# Altium PCB PCB bai 1.PcbDoc
Units mil, origin at the board's own origin, x right, y up, seen from the top; angles counter-clockwise.
Board outline 4135.03 x 2330.02 mil, 2 copper layers (Top Layer, Bottom Layer); 25 components, 18 nets, 88 pads, 0 vias.
Unrouted connection lines stored in the file: 31.
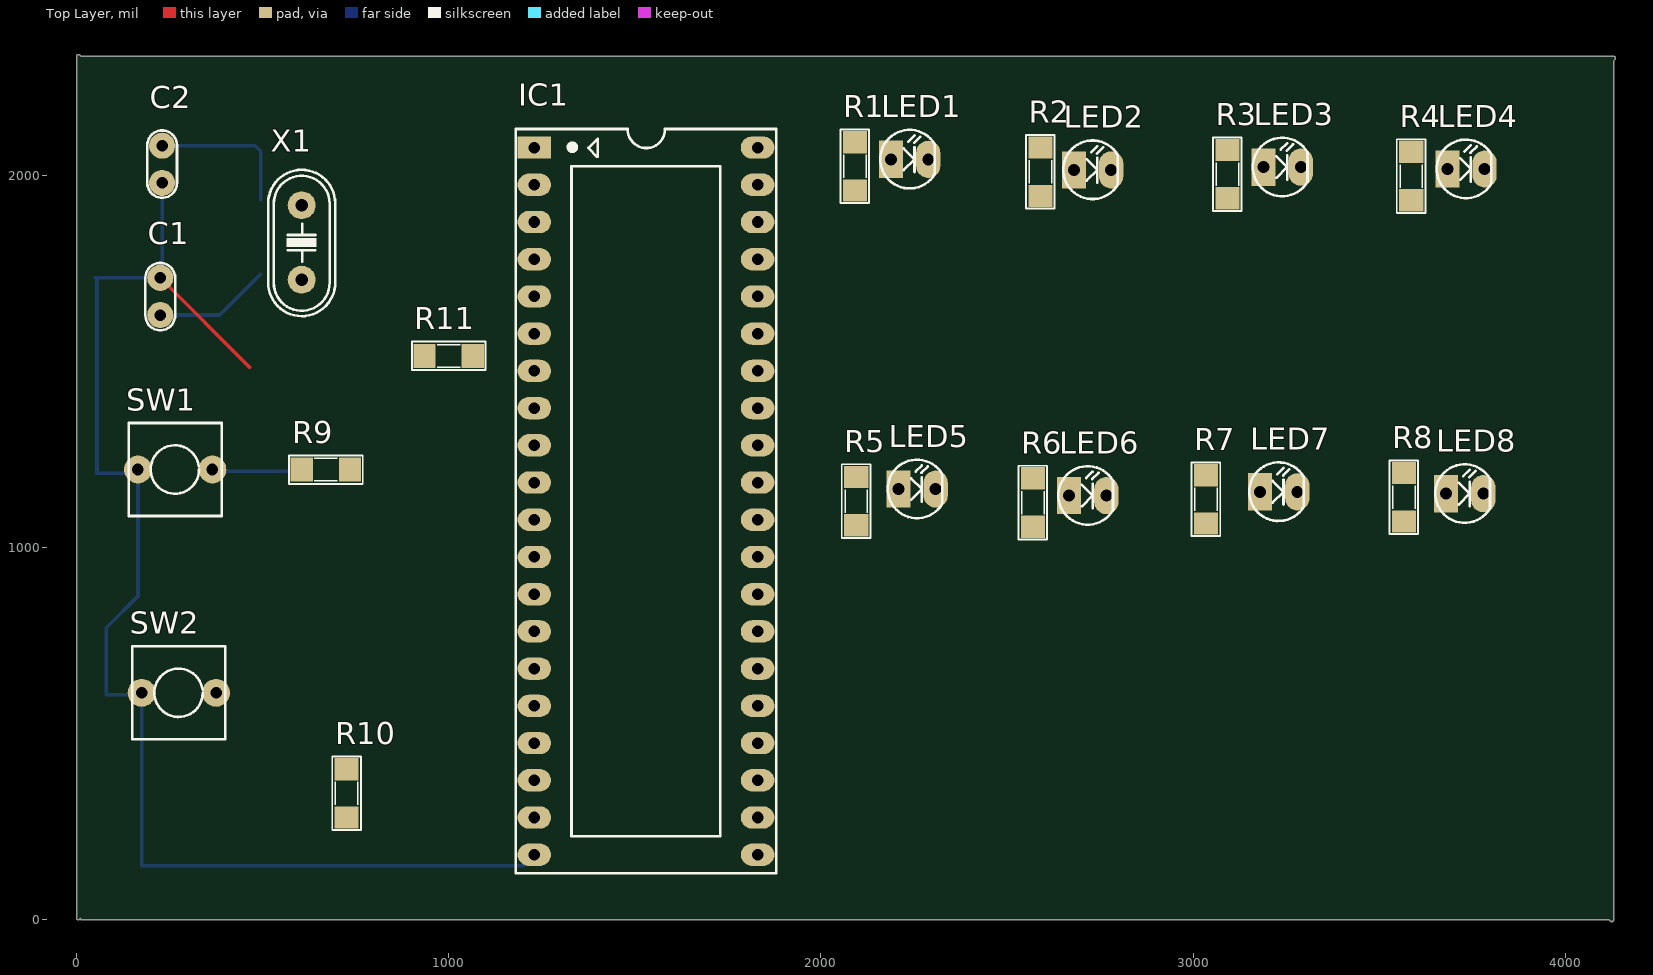
[diagram p0: Top Layer view]
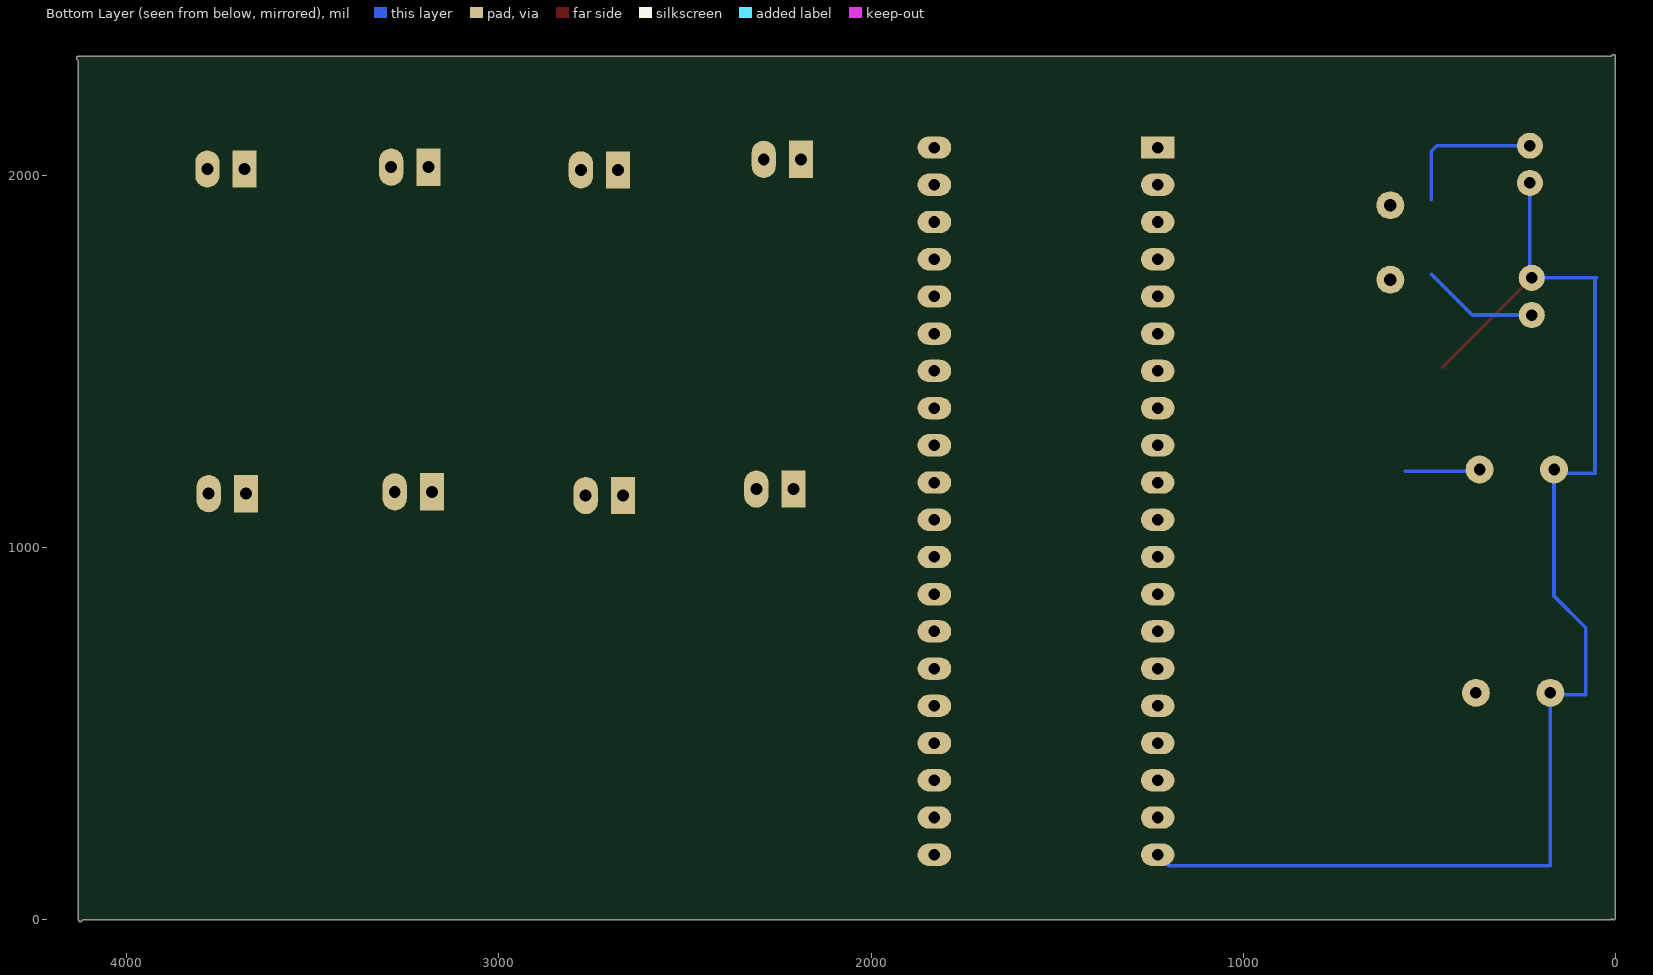
[diagram p1: Bottom Layer view, seen from below]

## Layer stack, top to bottom
Top Solder: solder mask 0.4, Solder Resist, Dk 3.5
Top Layer: signal copper 1.4
Dielectric 1: dielectric 12.6, FR-4, Dk 4.8
Bottom Layer: signal copper 1.4
Bottom Solder: solder mask 0.4, Solder Resist, Dk 3.5

## Board outline
-0.02,5 -0.02,2320 cw(c5,2320) 8.56,2323.53 8.55,2323.55 12.08,2320.02 4130,2320.02 cw(c4130,2315) 4135.02,2315 cw(c4130,2315) 4133.53,2311.44 4133.55,2311.45 4130.02,2307.92 4130.02,0 cw(c4125,0) 4121.44,-3.53 4121.45,-3.55 4117.92,-0.02 15,-0.02 cw(c15,5) 10,4.61 cw(c5,5)

## Design rules (kind name [scope] priority, off if disabled: settings)
Clearance [All] p1: gap=10 ignorepadtopadclearanceinfootprint=FALSE except(0: Arc-Hole Track-Hole SMDPad-Hole THPad-Hole Via-Hole Fill-Hole Poly-Hole Region-Hole Text-Hole)
PolygonConnect [All] p1: connectstyle=Relief reliefconductorwidth=10 reliefentries=4 polygonreliefangle="90 Angle" airgapwidth=10
RoutingVias [All] p1: holewidth=28 width=50 viastyle="Through Hole" minholewidth=28 minwidth=50 maxholewidth=28 maxwidth=50
SolderMaskExpansion [All] p1: expansion=4
Width [All] p1: maxlimit=10 minlimit=10 preferedwidth=10
30 further rules are at their usual default settings.

## Components (designator, comment, footprint, x,y, rotation, side; value= is the part's Value field where it differs from the comment)
C1 "33pf" CN1 225,1725 r270 top value=103
C2 "33pf" CN1 230,1980 r90 top value=103
IC1 "AT89C52" DIP40/W0.6 1230,2075 r270 top
LED1 "LED" LED-3 2188.5,2043.5 r0 top value="LED 3 ly Single Colour"
LED2 "LED" LED-3 2680,2015 r0 top value="LED 3 ly Single Colour"
LED3 "LED" LED-3 3189.59,2022.41 r0 top value="LED 3 ly Single Colour"
LED4 "LED" LED-3 3683.5,2017.41 r0 top value="LED 3 ly Single Colour"
LED5 "LED" LED-3 2208.5,1157.41 r0 top value="LED 3 ly Single Colour"
LED6 "LED" LED-3 2667,1140 r0 top value="LED 3 ly Single Colour"
LED7 "LED" LED-3 3180,1150 r0 top value="LED 3 ly Single Colour"
LED8 "LED" LED-3 3680,1145 r0 top value="LED 3 ly Single Colour"
R1 "330R" SM-RES-1206 2091.5,1959.59 r90 top value="R1/4W - 1K"
R2 "330R" SM-RES-1206 2590,1945 r90 top value="R1/4W - 1K"
R3 "330R" SM-RES-1206 3092.59,1938.5 r90 top value="R1/4W - 1K"
R4 "330R" SM-RES-1206 3586.5,1933.5 r90 top value="R1/4W - 1K"
R5 "330R" SM-RES-1206 2095,1060 r90 top value="R1/4W - 1K"
R6 "330R" SM-RES-1206 2570,1056.09 r90 top value="R1/4W - 1K"
R7 "330R" SM-RES-1206 3035,1065 r90 top value="R1/4W - 1K"
R8 "330R" SM-RES-1206 3566.5,1070.5 r90 top value="R1/4W - 1K"
R9 "10k" SM-RES-1206 735,1210 r180 top value="R1/4W - 1K"
R10 "10k" SM-RES-1206 725,405 r270 top value="R1/4W - 1K"
R11 "10k" SM-RES-1206 935,1515 r0 top value="R1/4W - 1K"
SW1 "SW" SW2 165,1210 r0 top value="SW chip 2 pin"
SW2 "SW" SW2 175,610 r0 top value="SW chip 2 pin"
X1 "CRYSTAL" XT2 605,1820 r90 top value=4Mhz

## Footprints (in the part's own frame and the unit in brackets; to place one, negate y for a bottom-side part, rotate by r counter-clockwise, add the part's x,y. Pads: shape width x height; smd on the part's side, far side on the other; paste and mask are expansions set on the pad)
CN1 [mil]
  round 70 hole 31: 1(0,0) 2(100,0)
  silkscreen extent -40,-40 141,40, body extent -60,-30 170,37, height 265
DIP40/W0.6 [mil] "40 PIN, W 600mil, Pin to pin 100mil"
  rect 60x90 hole 31: 1(0,0)
  oval 60x90 hole 31: 2(100,0) 3(200,0) 4(300,0) 5(400,0) 6(500,0) 7(600,0) 8(700,0) 9(800,0) 10(900,0) 11(1000,0) 12(1100,0) 13(1200,0) 14(1300,0) 15(1400,0) 16(1500,0) 17(1600,0) 18(1700,0) 19(1800,0) 20(1900,0) 21(1900,600) 22(1800,600) 23(1700,600) 24(1600,600) 25(1500,600) 26(1400,600) 27(1300,600) 28(1200,600) 29(1100,600) 30(1000,600) 31(900,600) 32(800,600) 33(700,600) 34(600,600) 35(500,600) 36(400,600) 37(300,600) 38(200,600) 39(100,600) 40(0,600)
  silkscreen extent -50,-50 1950,650, body extent -82,-10 1982,600, height 224
LED-3 [mil] "LED 2 PIN, 3ly Only colour"
  rect 65x100 hole 32: 1(0,0)
  oval 65x100 hole 32: 2(100,0)
  silkscreen extent -29,-78 118,79, body extent -25,-75 113,75, height 217
SM-RES-1206 [mil]
  rect 60x65 smd: 1(0,0) 2(130,0)
  silkscreen extent -34,-38 164,39, body extent 2,-31 128,32, height 40
SW2 [mil] "SW button 2pin, 250x 250 mil"
  round 75 hole 31: 1(0,0) 2(200,0)
  silkscreen extent -25,-125 225,125
XT2 [mil] "Footpin for Crystal 2 pin"
  round 75 hole 34: 1(-100,0) 2(100,0)
  silkscreen extent -198,-90 195,90, body extent -233,-93 213,90, height 138

## Part data
C1 C2: library part CM, "Cap SMD"
IC1: "Atmel AT89C52, 8k Byte Flash Memory , 40 Pin"
LED1 LED2 LED3 LED4 LED5 LED6 LED7 LED8: "LED Single colour Green and Red"
R1 R2 R3 R4 R5 R6 R7 R8 R9 R10 R11: library part R, "Resistor 1/4W"
SW1 SW2: library part SW2, "Switch button 2 pin"
X1: library part XT2, "Crystal For all Crystal 2pin."

## Nets (pads, with @x,y where several pads share a name; then routed paths per layer and width w, separated by ;. In a path a pad name is that pad's centre, name@x,y a point inside that pad or via, vN(x,y) a via of type N, cw(c..) or ccw(c..) an arc to the next point about the centre after c; other vN are vias at no path point)
GND: C1.1 C2.1 IC1.20 R11.1 SW1.1 SW2.1 | length 3687.4
  Top Layer w10: SW2.1 SW2.1@180,610 ; C1.1 465,1485
  Bottom Layer w10: C2.1 230,1730 C1.1 50,1725 55,1720 55,1200 155,1200 SW1.1 165,870 80,785 80,605 170,605 SW2.1 175,145 1200,145 IC1.20
Net1: IC1.28 LED1.2
Net2: IC1.27 LED2.2
Net3: IC1.26 LED3.2
Net4: IC1.25 LED4.2
Net5: IC1.24 LED5.2
Net6: IC1.23 LED6.2
Net7: IC1.22 LED7.2
Net8: IC1.21 LED8.2
NetC1_2: C1.2 IC1.19 X1.1 | length 315.6
  Bottom Layer w10: C1.2 385,1625 495,1735
NetC2_2: C2.2 IC1.18 X1.2 | length 401.2
  Bottom Layer w10: C2.2 480,2080 495,2065 495,1935
NetIC1_1: IC1.1 R10.2 SW2.2
NetIC1_8: IC1.8 R9.2 SW1.2 | length 202.1
  Bottom Layer w10: SW1.2 370,1205 565,1205
NetIC1_9: IC1.9 R11.2 | length 25
  Top Layer w10: IC1.9@1205,1275 IC1.9
NetLED5_1: LED5.1 R5.1
NetLED7_1: LED7.1 R7.1
NetLED8_1: LED8.1 R8.1
VCC: IC1.31 R1.2 R2.2 R3.2 R4.2 R5.2 R6.2 R7.2 R8.2 R9.1 R10.1
pads on no net: IC1.2 IC1.3 IC1.4 IC1.5 IC1.6 IC1.7 IC1.10 IC1.11 IC1.12 IC1.13 IC1.14 IC1.15 IC1.16 IC1.17 IC1.29 IC1.30 IC1.32 IC1.33 IC1.34 IC1.35 IC1.36 IC1.37 IC1.38 IC1.39 IC1.40 LED1.1 LED2.1 LED3.1 LED4.1 LED6.1 R1.1 R2.1 R3.1 R4.1 R6.1

## Silkscreen, mask and mechanical layers (free items; w line width, h text height)
Top Paste:
  lines w10: 5,5 5,2320 10,2315 4130,2315 4125,2310 4125,90 4125,0 4120,5 15,5